# Allegro board DESIGN1_17_2.brd
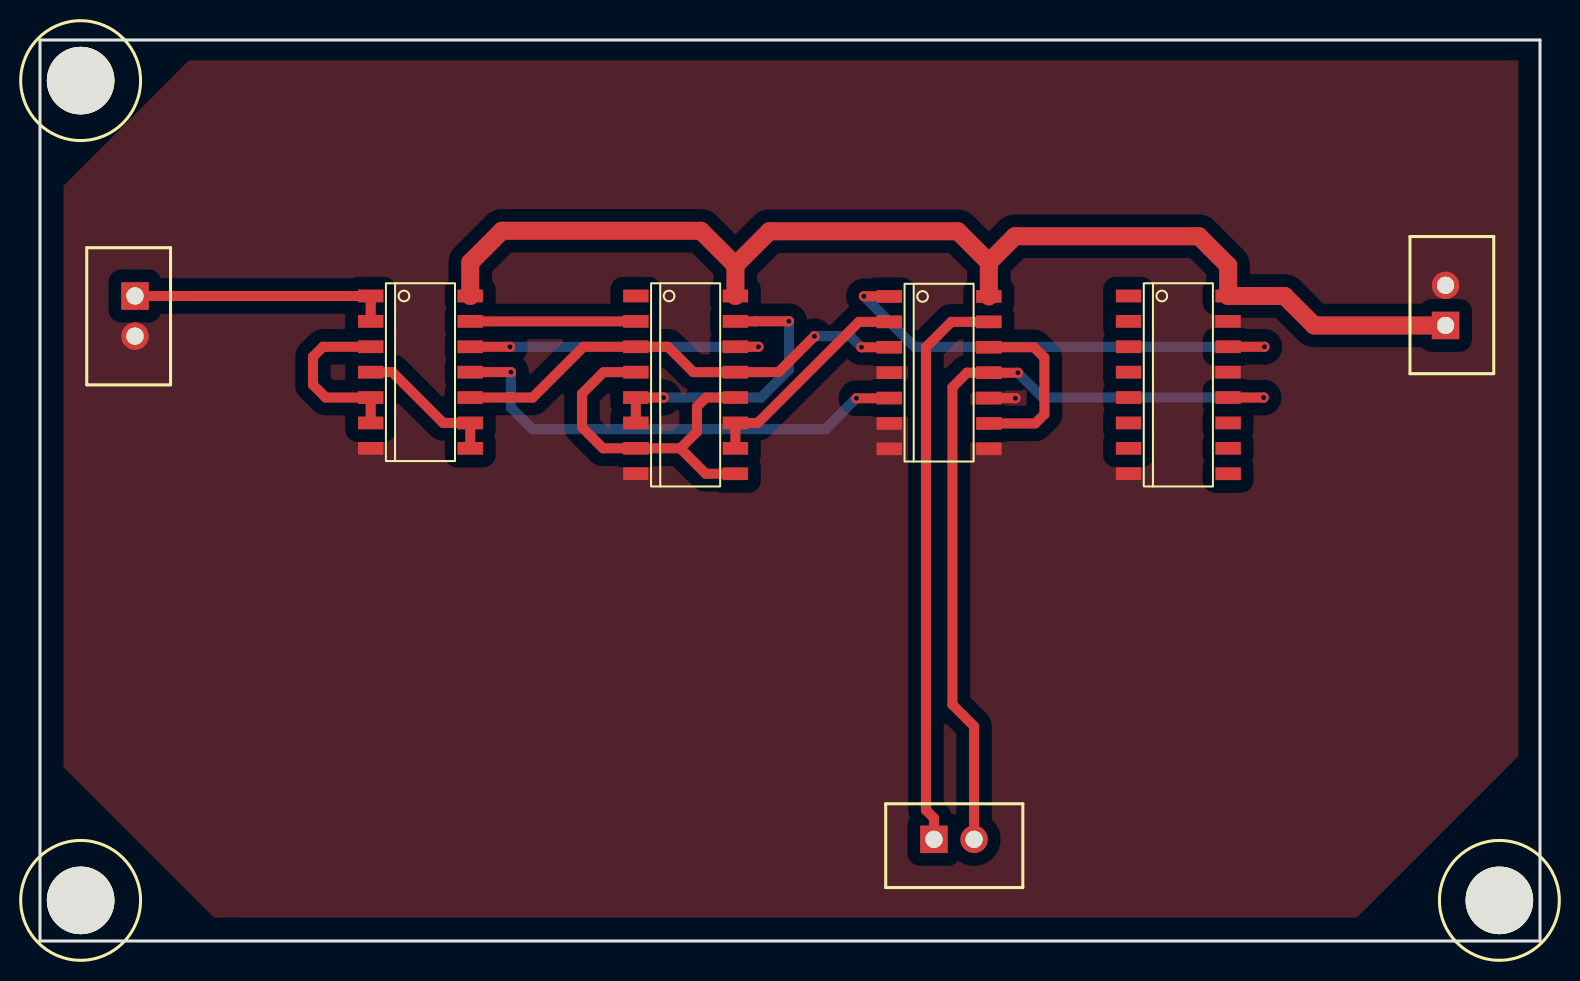
[diagram p0: board, top side]
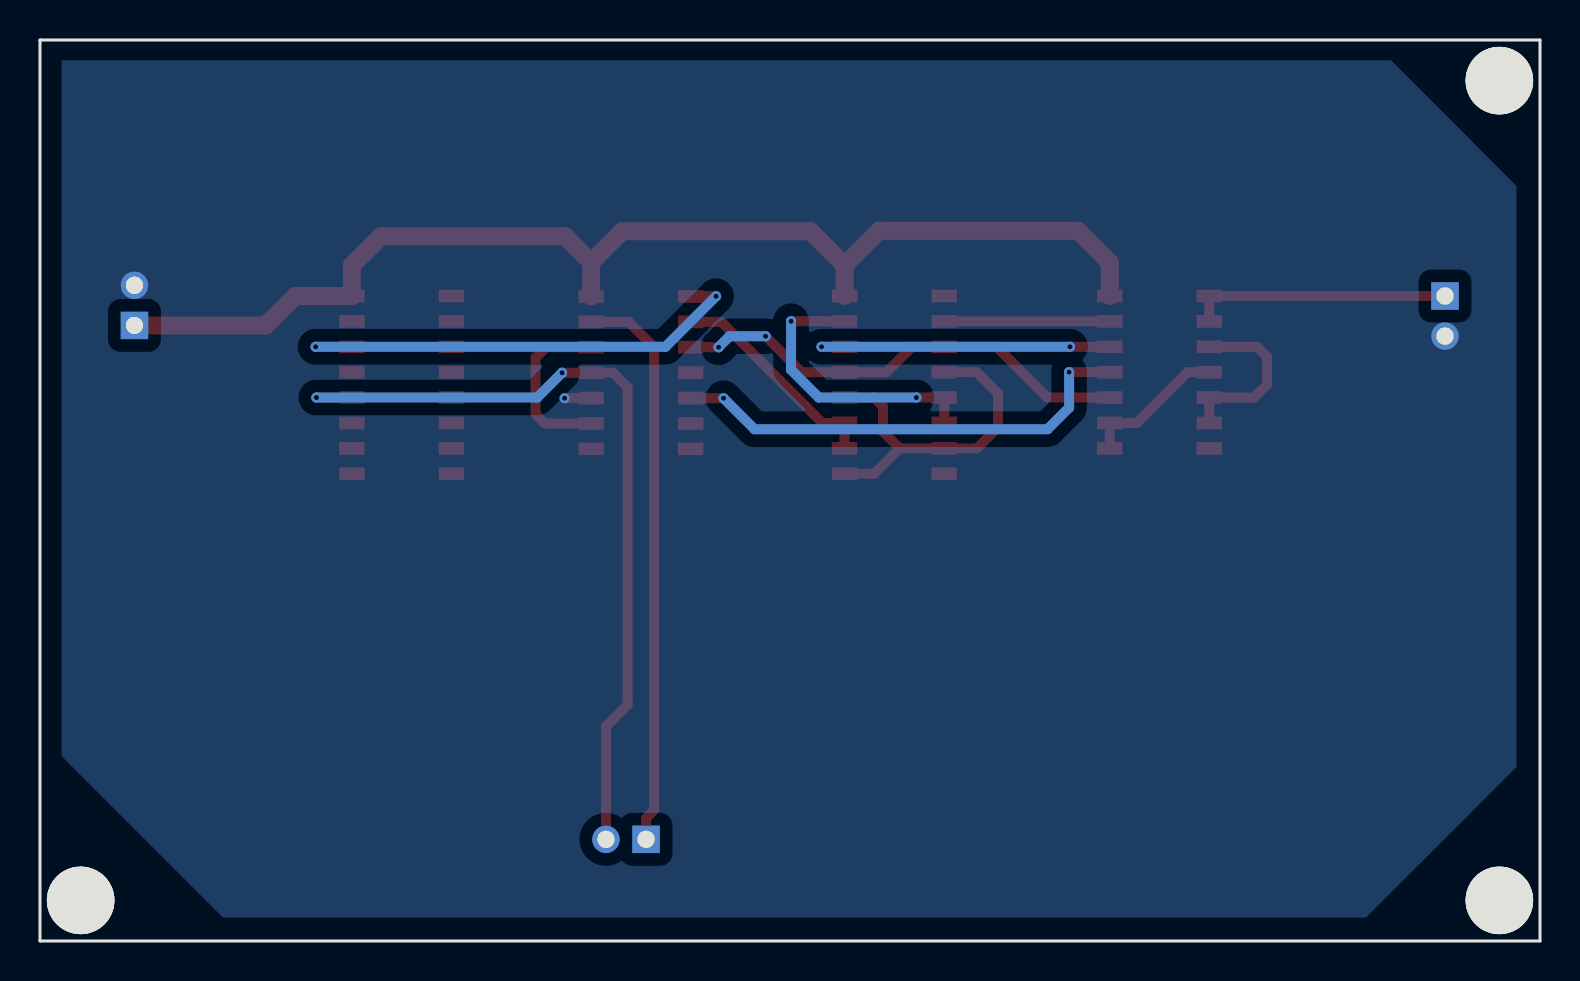
[diagram p1: board, bottom side, seen from below]

Outline 75.01 x 45.06 mm; copper layers: TOP, BOTTOM. Coordinates in mm from the lower left corner of the outline.
Outline path: 0,45.06 75.01,45.06 75.01,0 0,0 0,45.06

## Design rules (mm)
constraint set DEFAULT: min track width 0.127

## Placement (name value [footprint] x y rotation side)
J1  CON2X1  [CON2]  4.75 32.26 270 top
J2  CON2X1  [CON2]  70.28 30.79 90 top
J3  CON2X1  [CON2]  44.7 5.08 0 top
MH*  -  [unnamed]  72.97 2.03 0 top
MH*#2  -  [unnamed]  2.03 43.03 0 top
MH*#3  -  [unnamed]  2.03 2.03 0 top
NOREF  -  [#2]  -49.88 48.64 0 top
NOREF#2  -  [#2]  158.82 -21.45 0 top
NOREF#3  -  [#2]  0 45.06 0 top
NOREF#4  -  [#2]  75.01 0 90 top
U1  4001  [SOIC14]  19.02 28.45 0 top
U2  4027  [SOIC16]  32.28 27.81 0 top
U3  4013  [SOIC14]  44.96 28.42 0 top
U4  4017  [SOIC16]  56.92 27.81 0 top

## Library data of the parts
J1-J3 = CON_HEADER_1x2_2.0MM
U1 = 4001: Tolerance: ***; User Part Number: ***
U2 = 40175_1: Tolerance: ***; User Part Number: ***
U3 = 40174_0: Tolerance: ***; User Part Number: ***
U4 = 4017_0: Tolerance: ***; User Part Number: ***

## Footprints (pads in the part's own frame, mm; a bottom-side part is the same pattern mirrored in y, then rotated)
CON2
  rect 1.372x1.372 hole 0.864: 1(0,0)
  round 1.372 hole 0.864: 2(2.007,0)
SOIC14
  rect 1.27x0.635 smd: 1(-2.489,3.81) 2(-2.489,2.54) 3(-2.489,1.27) 4(-2.489,0) 5(-2.489,-1.27) 6(-2.489,-2.54) 7(-2.489,-3.81) 8(2.489,-3.81) 9(2.489,-2.54) 10(2.489,-1.27) 11(2.489,0) 12(2.489,1.27) 13(2.489,2.54) 14(2.489,3.81)
SOIC16
  rect 1.27x0.635 smd: 1(-2.489,4.445) 2(-2.489,3.175) 3(-2.489,1.905) 4(-2.489,0.635) 5(-2.489,-0.635) 6(-2.489,-1.905) 7(-2.489,-3.175) 8(-2.489,-4.445) 9(2.489,-4.445) 10(2.489,-3.175) 11(2.489,-1.905) 12(2.489,-0.635) 13(2.489,0.635) 14(2.489,1.905) 15(2.489,3.175) 16(2.489,4.445)
unnamed
  round 3.378 hole 3.505 unplated: (0,0)

## Nets
GND: J1.2 J2.2 U1.7 U2.8 U3.4 U3.6 U3.7 U3.8 U3.10 U4.8(VSS) U4.13 U4.15
+V: J2.1 U1.14 U2.16(VDD) U3.14(VDD) U4.16
N14340442: J1.1 U1.1 U1.2
N14340459: U1.3 U1.5 U1.6
N14340483: U1.4 U1.8 U1.9
N14340510: U1.10 U2.3 U2.13 U3.3
N14341374: U2.4 U2.7 U2.9 U2.12
N14341415: U2.5 U2.6 U2.15
N14341507: U1.12 U2.14
N14341511: U1.13 U2.2
N14341515: U1.11(O) U3.5
N14341519: U2.10 U2.11 U3.2
N14342152: U3.9 U3.12
N14342464: U3.1 U4.14
N14342485: J3.2 U3.11 U4.12
N14342489: J3.1 U3.13

Pads without a net: U2 1; U4 1 2 3 4 5 6 7 9 10 11

## Via types
v1: diameter 0.508, hole 0.254, TOP to BOTTOM, 13 vias

## Routing (per net, layer and track width the routed paths; a pad name or vN(x,y) marks a point on that pad's centre or on a via; arc(x,y) is an arc through that point)
GND: length 1.3
  TOP w0.5: 47.45,27.15 48.77,27.15 v1(48.77,27.14)
+V: length 59.7
  TOP w0.9: U1.14 21.51,33.93 23.1,35.52 33.05,35.52 34.77,33.79 ; 47.45,33.94 47.45,32.23 ; 47.45,33.94 48.75,35.24 57.95,35.24 59.41,33.78 U4.16 62.24,32.26 63.71,30.79 J2.1 ; 47.45,33.94 45.9,35.49 36.47,35.49 34.77,33.79 ; U2.16 34.77,33.79
N14340442: length 13.1
  TOP w0.5: J1.1 U1.1 U1.2
N14340459: length 8.9
  TOP w0.5: U1.6 U1.5 14.29,27.18 13.65,27.82 13.65,29.22 14.15,29.72 U1.3
N14340483: length 7.3
  TOP w0.5: U1.8 U1.9 20.16,25.91 17.62,28.45 U1.4
N14340510: length 23.5
  TOP w0.5: v1(38.73,30.24) 36.93,28.45 U2.13 32.67,28.45 31.4,29.72 U2.3 27.17,29.72 24.63,27.18 U1.10 ; v1(41.08,29.69) U3.3
  BOTTOM w0.5: v1(38.73,30.24) 40.52,30.24 v1(41.08,29.69)
N14341374: length 18
  TOP w0.5: 32.02,24.64 32.85,25.47 32.85,26.72 33.31,27.18 U2.12 ; 32.02,24.64 U2.7 28.16,24.64 27.1,25.69 27.1,27.37 28.18,28.45 U2.4 ; 32.02,24.64 33.29,23.37 U2.9
N14341415: length 14.6
  TOP w0.5: U2.6 U2.5 v1(31.18,27.18) ; v1(37.45,30.99) 35.79,30.99 35.78,30.99 U2.15
  BOTTOM w0.5: v1(31.18,27.18) 36.06,27.18 37.45,28.57 v1(37.45,30.99)
N14341507: length 15.6
  TOP w0.5: U1.12 v1(23.5,29.72) ; v1(35.93,29.72) U2.14
  BOTTOM w0.5: v1(23.5,29.72) v1(35.93,29.72)
N14341511: length 8.3
  TOP w0.5: U1.13 U2.2
N14341515: length 23.8
  TOP w0.5: U1.11 v1(23.55,28.45) ; v1(40.83,27.14) 42.46,27.14 U3.5
  BOTTOM w0.5: v1(23.55,28.45) 23.55,26.67 24.62,25.59 39.27,25.59 v1(40.83,27.14)
N14341519: length 11.1
  TOP w0.5: U3.2 40.94,30.96 35.89,25.91 U2.11 U2.10
N14342152: length 8.8
  TOP w0.5: 47.45,25.88 49.76,25.88 50.23,26.34 50.23,29.17 49.7,29.69 47.45,29.69
N14342464: length 24.2
  TOP w0.5: U4.14 v1(61.22,29.72) ; v1(41.2,32.24) 42.46,32.24 U3.1
  BOTTOM w0.5: v1(61.22,29.72) 43.73,29.72 v1(41.2,32.24)
N14342485: length 41.2
  TOP w0.5: v1(48.9,28.42) 47.45,28.42 47.45,28.42 46.35,28.42 45.62,27.69 45.62,11.82 46.71,10.74 J3.2 ; U4.12 v1(61.18,27.18)
  BOTTOM w0.5: v1(48.9,28.42) 50.14,27.18 v1(61.18,27.18)
N14342489: length 28.4
  TOP w0.5: J3.1 44.7,6.15 44.3,6.55 44.3,29.69 45.57,30.96 47.45,30.96

## Copper pours and planes (outline as drawn; the poured copper is in the pictures)
GND on TOP, BOTTOM: 1.18,37.76 1.18,8.69 8.7,1.17 65.85,1.17 73.92,9.24 73.92,44.04 7.45,44.04

## Text on the board
DEVICE_TYPE_TOP: MINIMUM TRACE WIDTH AND SPACING : .008" / .010".
TOLERANCE_TOP: C1/X2 | MOV5 | MOV1 | F1 | MOV2 | TX1 | C4A | C4 | TX2 | CY1 | D5 | D6 | D7 | LED+ | LED- | N | L | C5 | Q1 | L1 | MOV4 | NTC | BD1 | MOV3 | E | C2 | C3 | R9 | C8 | C9 | AC | 4
User.7: SECONDARY-SILKSCREEN | 6
User.13: FIGURE | FINISHED_SIZE | 10.0 | 34.01575 | 137.9921 | DRILL CHART: TOP to BOTTOM | ALL UNITS ARE IN MILS | PLATED | NON-PLATED | QTY | 13 | 6 | 3
